# Altium PCB panel.PcbDoc (part 1 of 3)
Units mm, origin at the board's own origin, x right, y up, seen from the top; angles counter-clockwise.
Board outline 152.4 x 101.6 mm, 2 copper layers (Top Layer, Bottom Layer); 276 components, 0 nets, 996 pads, 236 vias.
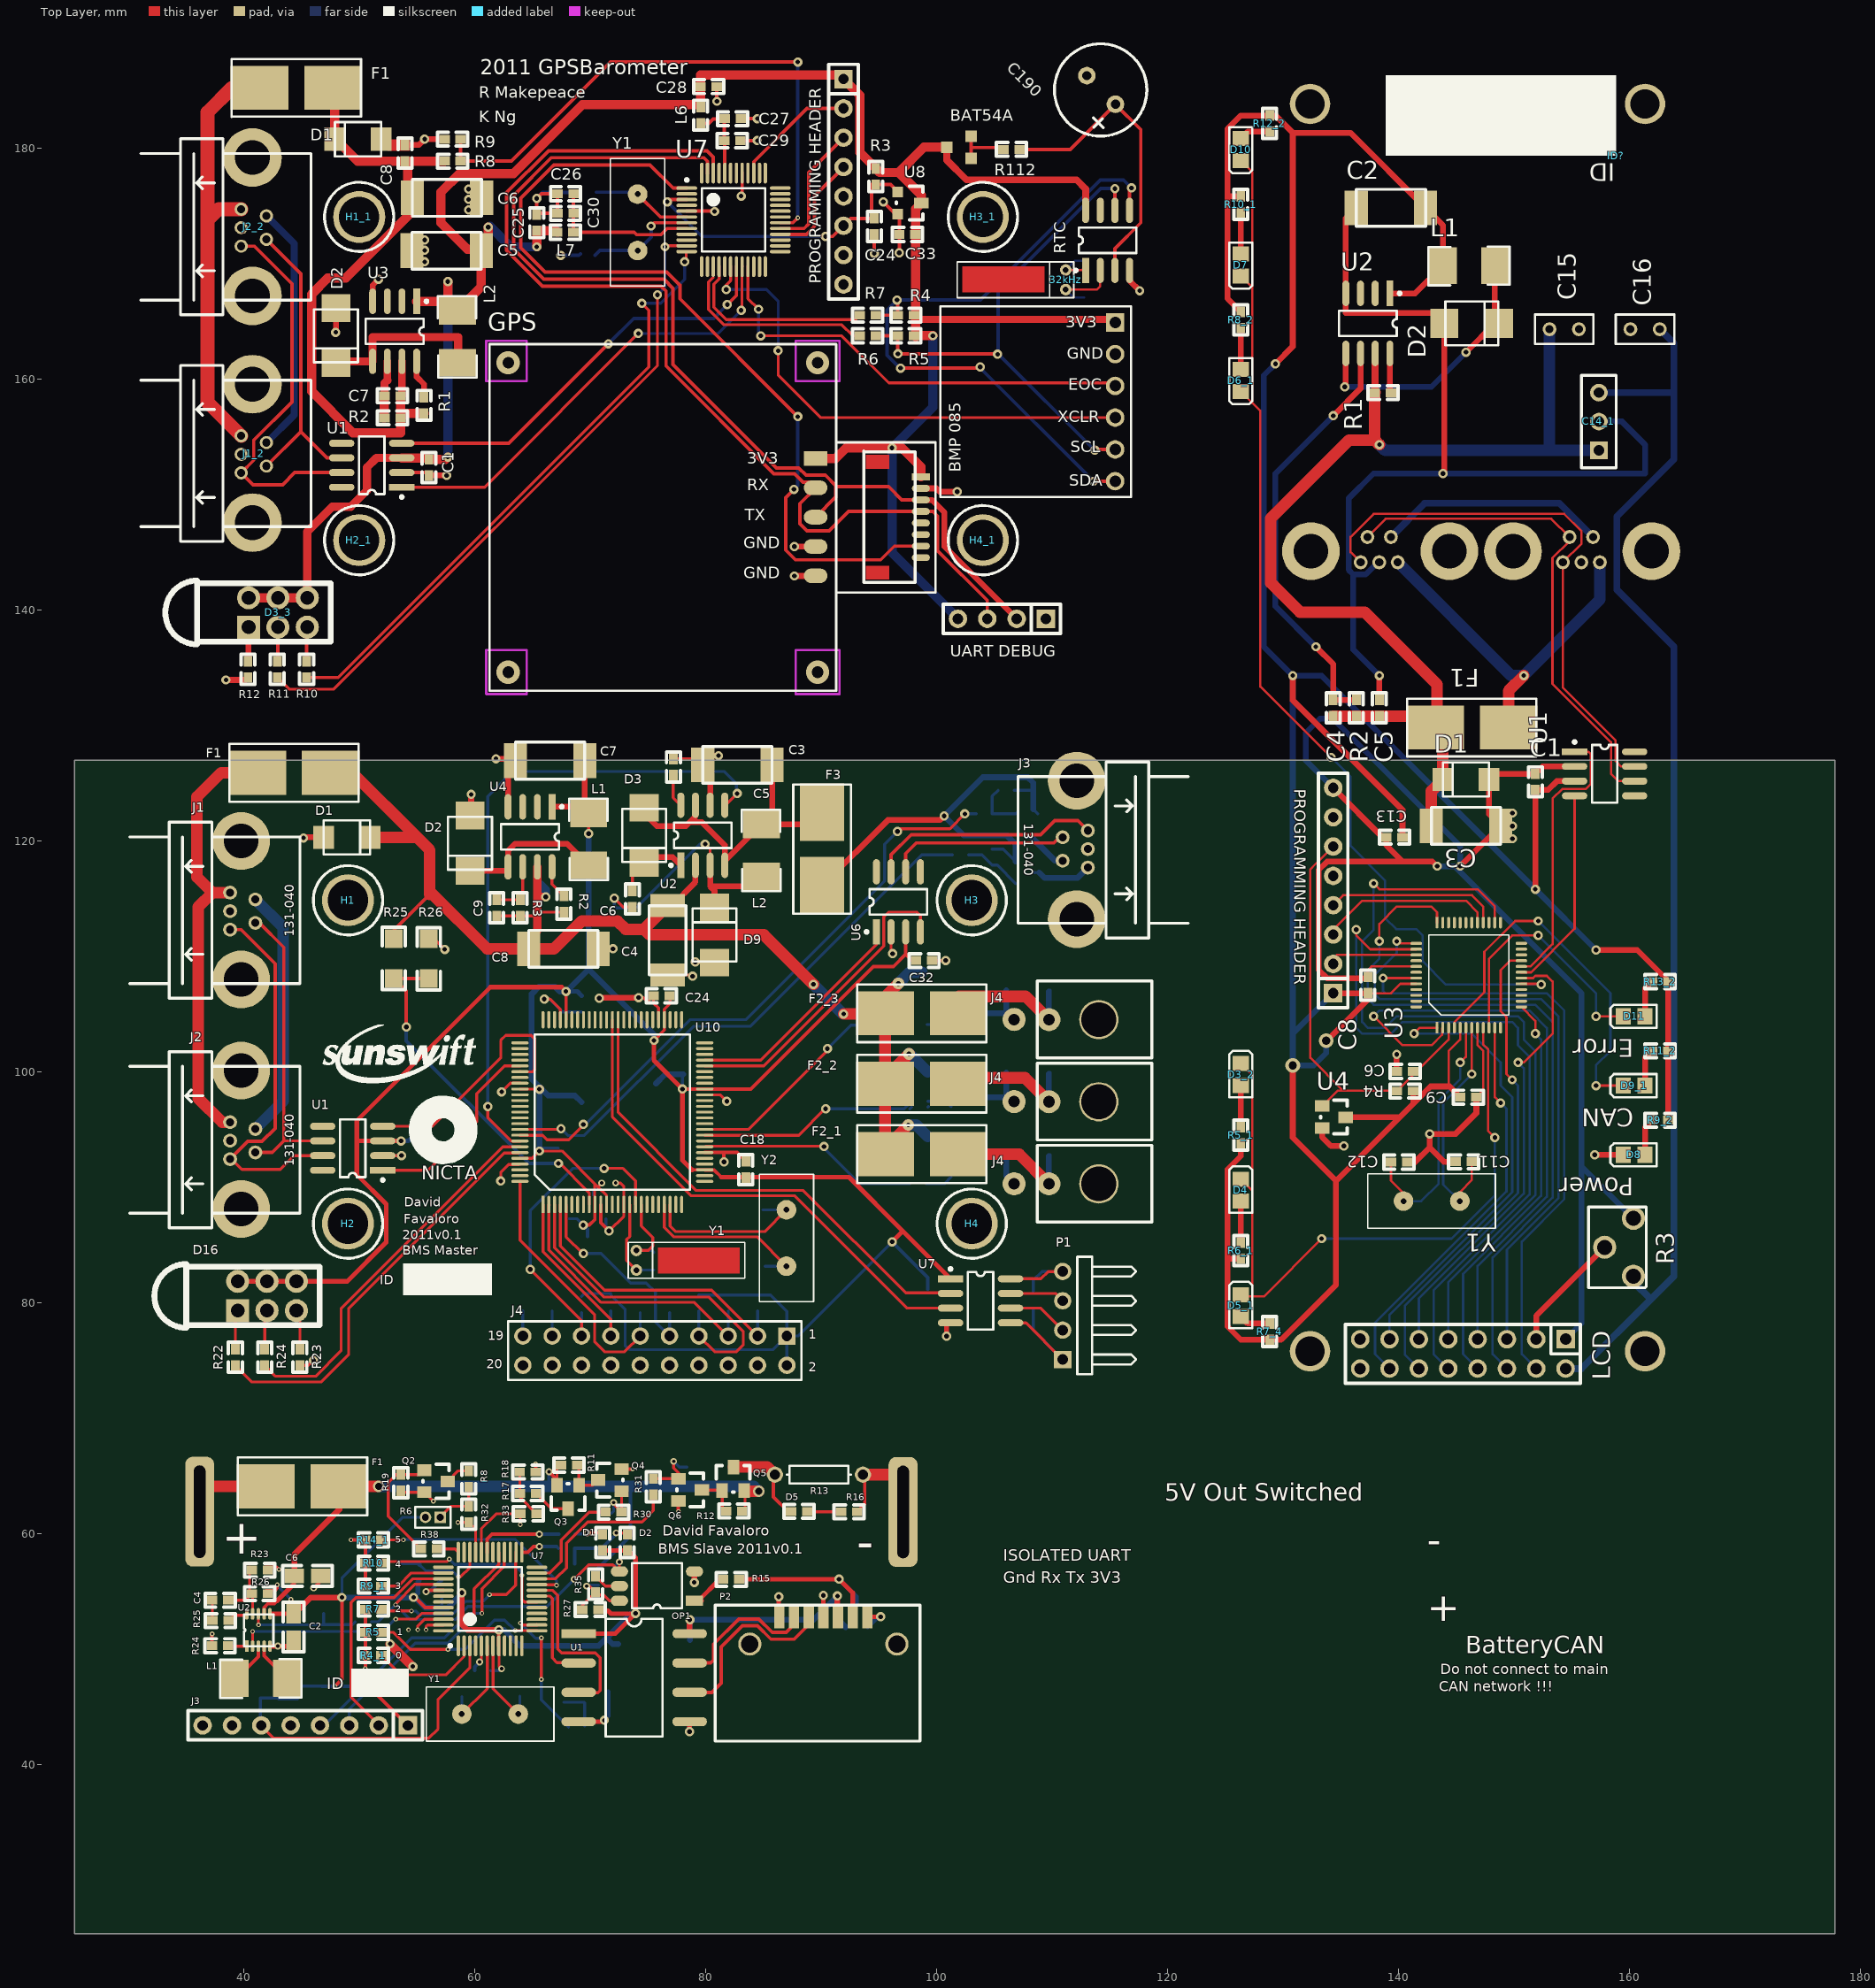
[diagram p0: Top Layer view]
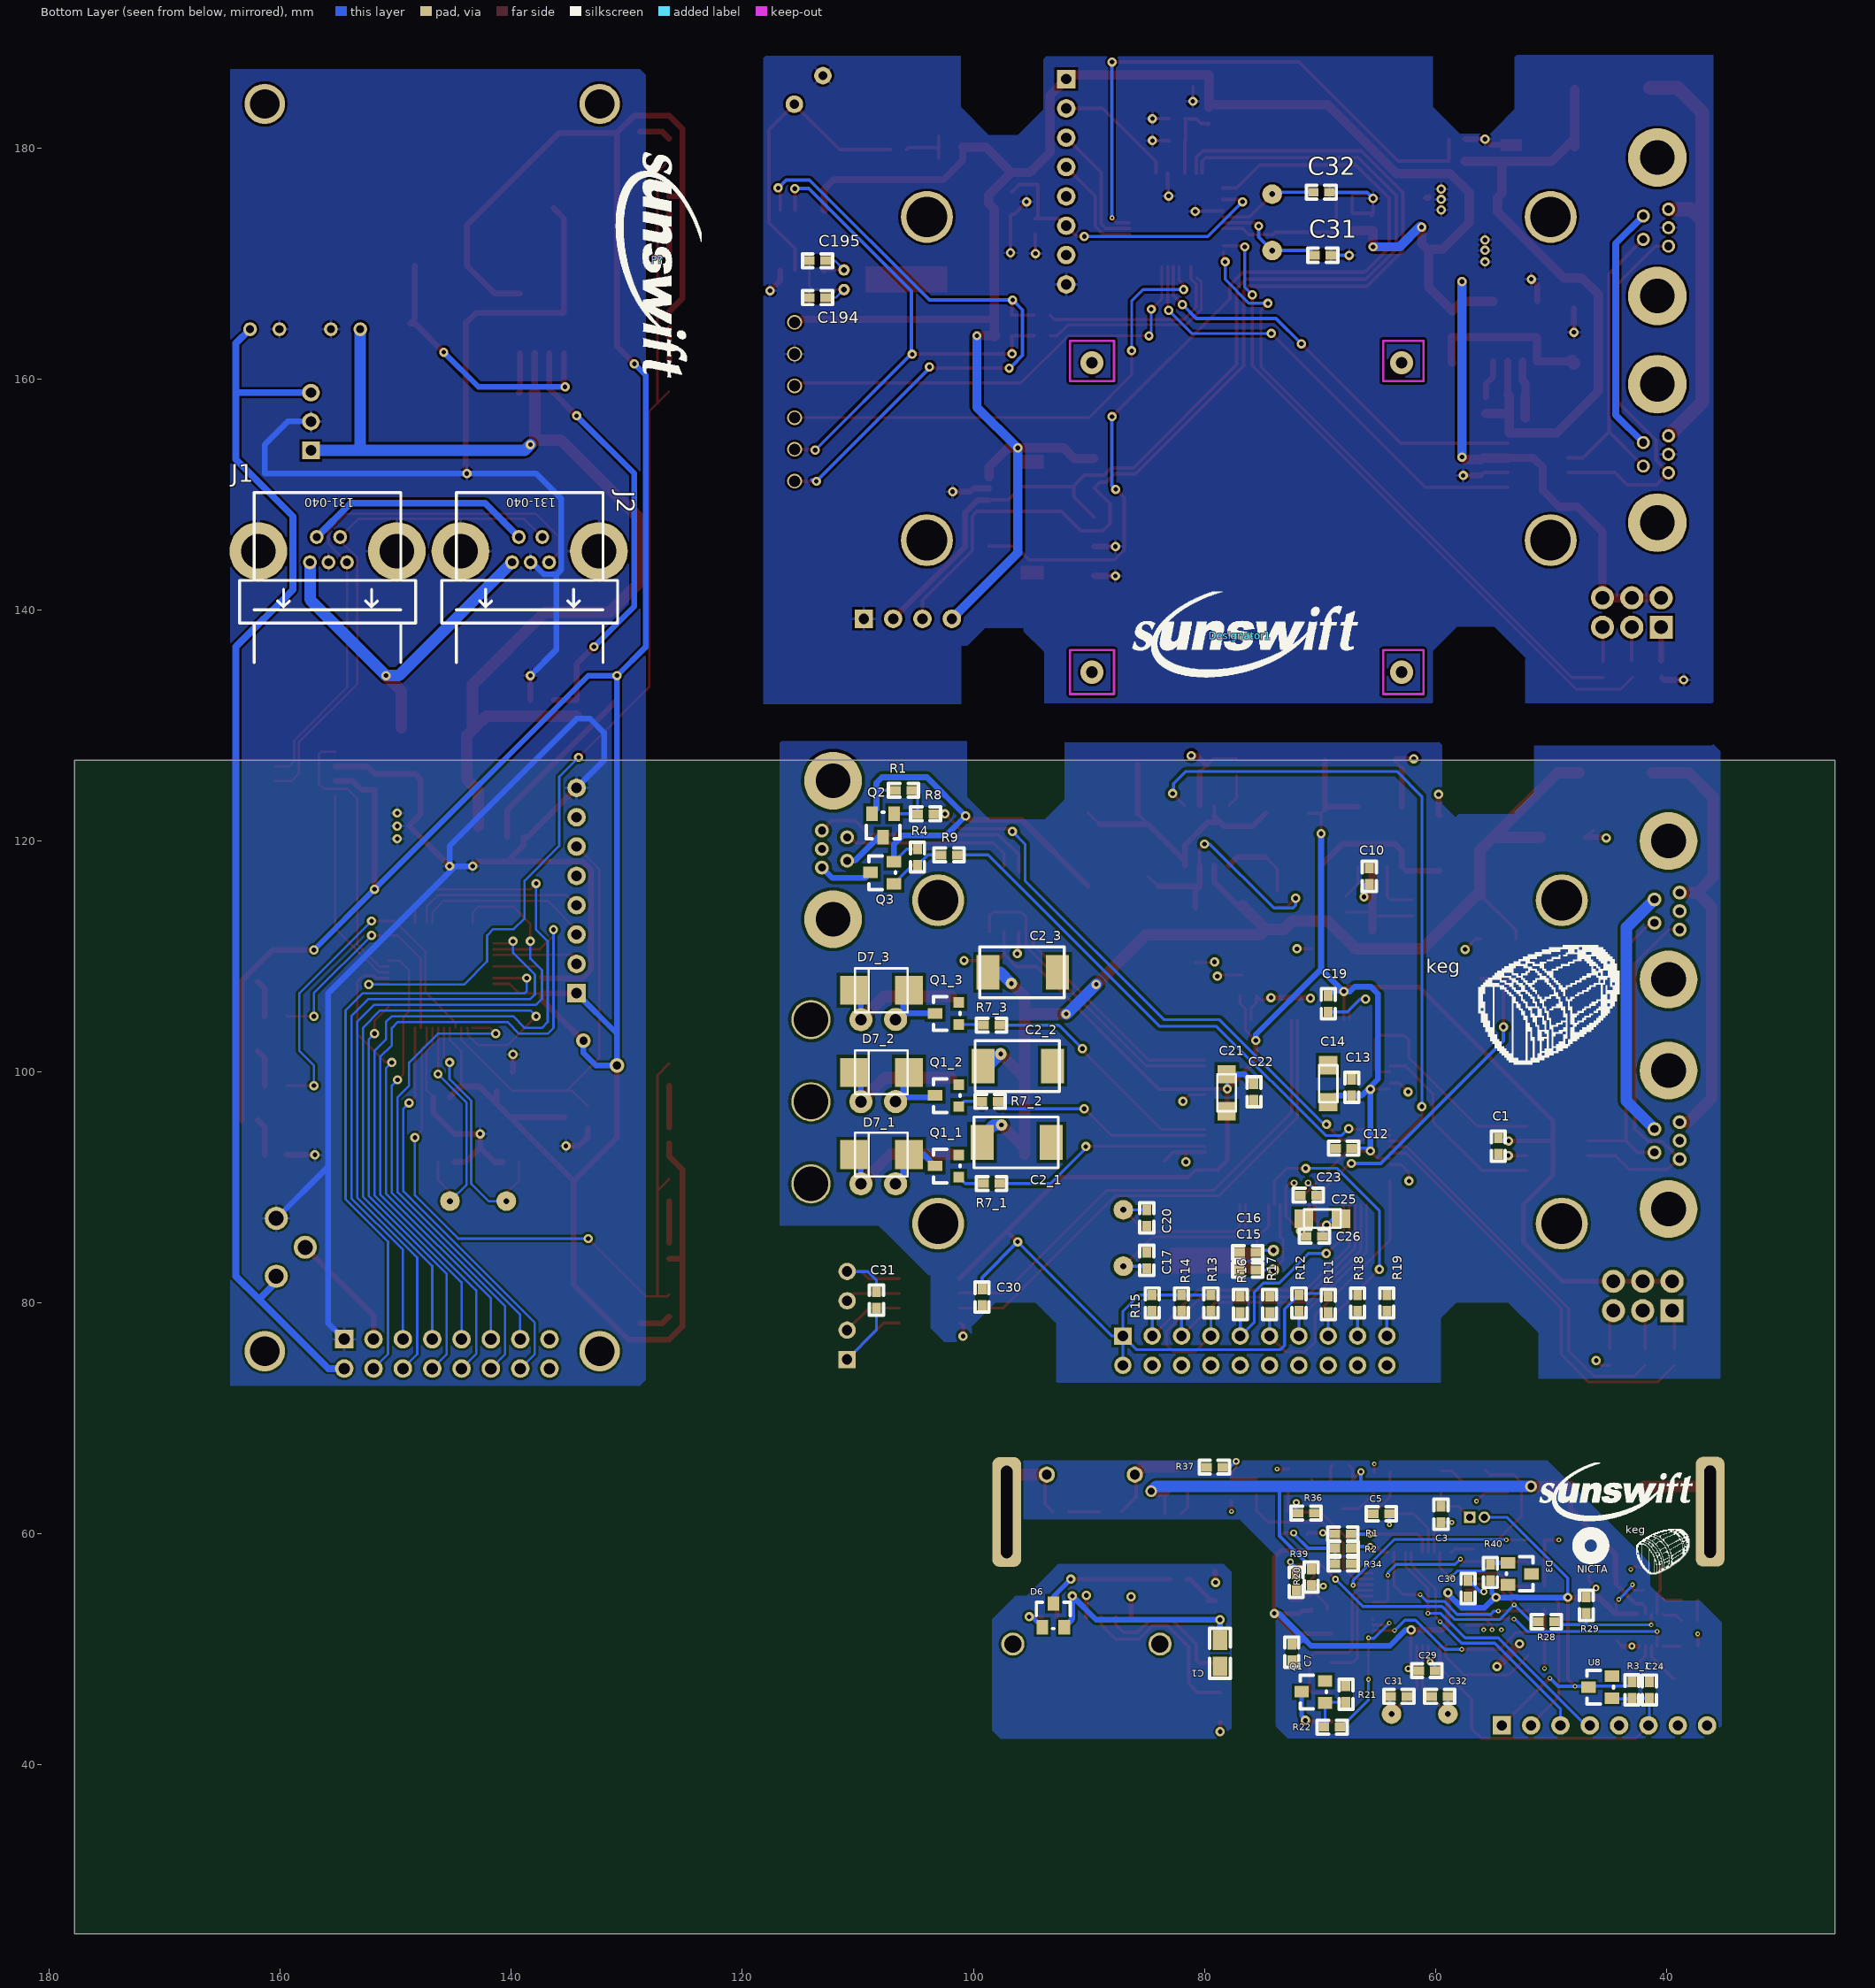
[diagram p1: Bottom Layer view, seen from below]

## Layer stack, top to bottom
Top Layer: signal copper 0.0356
Dielectric: dielectric 0.32, FR-4, Dk 4.8
Bottom Layer: signal copper 0.0356

## Board outline
25.4,25.4 177.8,25.4 177.8,127 25.4,127

## Design rules (kind name [scope] priority, off if disabled: settings)
Clearance [All] p1 off: gap=0.2
ComponentClearance [All] p1 off: gap=0.254 collisioncheckmode=3 verticalgap=0.254 showdistances=FALSE
DiffPairsRouting [All] p1 off: maxlimit=0.254 minlimit=0.254 mostfreqgap=0.254 maxuncoupledlength=12.7
FanoutControl Fanout_BGA [IsBGA] p1 off: bgadir=Out bgaviamode=Centered fanoutstyle=Auto fanoutdirection=Alternating viagrid=0.025 // Fanout_BGA (Default Rule)
FanoutControl Fanout_LCC [IsLCC] p2 off: bgadir=Out bgaviamode=Centered fanoutstyle=Auto fanoutdirection=Alternating viagrid=0.025 // Fanout_LCC (Default Rule)
FanoutControl Fanout_SOIC [IsSOIC] p3 off: bgadir=Out bgaviamode=Centered fanoutstyle=Auto fanoutdirection=Alternating viagrid=0.025 // Fanout_SOIC (Default Rule)
FanoutControl Fanout_Small [(CompPinCount < 5)] p4 off: bgadir=Out bgaviamode=Centered fanoutstyle=Auto fanoutdirection=OutThenIn viagrid=0.025 // Fanout_Small (Default Rule)
FanoutControl Fanout_Default [All] p5 off: bgadir=Out bgaviamode=Centered fanoutstyle=Auto fanoutdirection=Alternating viagrid=0.025 // Fanout_Default (Default Rule)
Height [All] p1 off: minheight=0 maxheight=25.4 prefheight=12.7
HoleSize [All] p1 off: absolutevalues=TRUE maxlimit=2.54 minlimit=0.025 maxpercent=80.000 minpercent=20.000
HoleToHoleClearance [All] p1 off: gap=0.254 allowstackedmicrovias=TRUE
LayerPairs [All] p1 off: enforce=TRUE
MinimumSolderMaskSliver [All] p1 off: minsoldermaskwidth=0.254
NetAntennae [All] p1 off: netantennaetolerance=0
PasteMaskExpansion [All] p1 off: expansion=0
PlaneClearance [All] p1 off: clearance=0.508
PlaneConnect [All] p1 off: planeconnectstyle=Relief reliefexpansion=0.508 reliefentries=4 reliefconductorwidth=0.254 reliefairgap=0.254
PolygonConnect [All] p1 off: connectstyle=Relief reliefconductorwidth=0.254 reliefentries=4 polygonreliefangle="90 Angle"
RoutingCorners [All] p1 off: cornerstyle=45-Degree minsetback=2.54 maxsetback=2.54
RoutingLayers [All] p1 off: top layer_v5=TRUE bottom layer_v5=TRUE
RoutingPriority [All] p1 off: routingpriority=0
RoutingTopology [All] p1 off: topology=Shortest
RoutingVias [All] p1 off: holewidth=0.711 width=1.27 viastyle="Through Hole" minholewidth=0.711 minwidth=1.27 maxholewidth=0.711 maxwidth=1.27
ShortCircuit [All] p1 off: allowed=FALSE
SilkToSilkClearance [All] p1 off: silktosilkclearance=0.254
SilkscreenOverComponentPads [All] p1 off: minsilkscreentomaskgap=0.254
SolderMaskExpansion [All] p1 off: expansion=0.102
TestPointUsage [All] p1 off: valid=0 allowmultiple=FALSE
Testpoint [All] p1 off: side=15 testpointundercomponent=TRUE minsize=1.016 maxsize=2.54 preferedsize=1.524 minholesize=0 maxholesize=1.016 preferedholesize=0.813 testpointgrid=0.025 style=1023 order=0123456789
UnRoutedNet [All] p1 off:
Width [All] p1 off: maxlimit=0.254 minlimit=0.254 preferedwidth=0.254

## Components (designator, comment, footprint, x,y, rotation, side; value= is the part's Value field where it differs from the comment)
32kHz "XTAL2" WATCHA 111.198,167.756 r90 top
+ "tab_connection" tab_connect 40.612,64.531 r90 top
- "tab_connection" tab_connect 101.512,64.511 r90 top
BAT54A "BAT54A" SOT23_2 103.008,181.032 r270 top
"BMP 085" "Component_1" PCBComponent_1 116.851,149.79 r90 top (schematic designator "Barometer BMP 085")
C1 "100nF" 0603 56.064,151.657 r90 top
C1 "100nF" 0603 151.852,125.828 r270 top
C1 "4.7uF" 0805 78.652,50.817 r270 bottom
C1 "100nF" 0603 54.544,92.895 r90 bottom
C2 "4u7 35V" MCCT-CASEC 142.352,174.828 r180 top
C2 "4.7uF" 0805 44.346,53.087 r270 top
C2_1 "100uF 35V" MCCT-CASED 99.248,93.911 r180 bottom (schematic designator C2)
C2_2 "100uF 35V" MCCT-CASED 99.152,100.515 r180 bottom (schematic designator C2)
C2_3 "100uF 35V" MCCT-CASED 98.74,108.643 r180 bottom (schematic designator C2)
C3 "4u7 35V" MCCT-CASEC 142.852,121.328 r0 top
C3 "100uF 35V" MCCT-CASEC 85.774,126.6 r180 top
C3 "100nF" 0603 59.512,61.011 r90 bottom
C4 "1n" 0603 134.352,130.828 r90 top
C4 "1.5nF" 0603 37.292,54.271 r0 top
C4 "10uF 35V" MCCT-CASEC 76.726,114.408 r270 top
C5 "4u7 35V" MCCT-CASEC 60.59,171.126 r180 top
C5 "100nF" 0603 138.352,130.828 r90 top
C5 "3.3nF" 0603 77.234,127.108 r270 top
C5 "100nF" 0603 63.972,61.751 r0 bottom
C6 "4u7 35V" MCCT-CASEC 54.621,175.698 r0 top
C6 "10nF" 0603 141.277,100.053 r180 top
C6 "4.7uF" 0805 44.402,56.363 r0 top
C6 "100nF" 0603 73.678,114.281 r90 top
C7 "1n" 0603 53.605,158.553 r180 top
C7 "4u7 35V" MCCT-CASEC 69.556,126.963 r180 top
C7 "100nF" 0603 72.432,50.448 r270 bottom
C8 "100nF" 0603 53.986,178.873 r90 top
C8 "100nF" 0603 137.352,106.828 r90 top
C8 "4u7 35V" MCCT-CASEC 64.704,110.675 r0 top
C9 "100nF" 0603 145.352,97.828 r0 top
C9 "1n" 0603 61.929,113.527 r90 top
C10 "100nF" 0603 65.72,116.263 r90 bottom
C11 "18pF" 0603 146.352,92.228 r180 top
C12 "18pF" 0603 139.352,92.203 r0 top
C12 "100nF" 0603 68.641,93.403 r180 bottom
C13 "100nF" 0603 140.352,120.328 r180 top
C13 "100nF" 0603 67.244,97.975 r90 bottom
C14 "10uF" MCCT-CASEA 69.276,98.991 r90 bottom
C14_1 "MC78M05CT" 7805 157.352,153.828 r90 top (schematic designator C14)
C15 "100u" RAD-0.1 154.352,164.328 r0 top
C15 "18pF" 0603 75.545,82.853 r0 bottom
C16 "100u" RAD-0.1 161.352,164.328 r180 top
C16 "18pF" 0603 75.545,84.377 r0 bottom
C17 "18pF" 0603 84.985,82.994 r90 bottom
C18 "100nF" 0603 83.5,90.863 r90 top
C19 "100nF" 0603 69.276,105.214 r90 bottom
C20 "18pF" 0603 84.985,88.074 r270 bottom
C21 "10uF" MCCT-CASEA 78.073,98.206 r270 bottom
C22 "100nF" 0603 75.704,97.591 r90 bottom
C23 "100nF" 0603 70.292,89.339 r0 bottom
C24 "10nF" 0603 94.626,173.92 r270 top
C24 "100nF" 0603 75.499,106.611 r0 top
C24 "10nF" 0603 41.472,45.791 r90 bottom
C25 "1u" 0603 65.398,174.241 r270 top
C25 "10uF" MCCT-CASEA 69.784,87.307 r0 bottom
C26 "10n" 0603 67.198,176.056 r0 top
C26 "100nF" 0603 69.784,85.783 r0 bottom
C27 "10n" 0603 81.672,182.556 r0 top
C28 "1u" 0603 79.591,185.328 r0 top
C29 "100nF" 0603 81.635,180.651 r0 top
C29 "100nF" 0603 61.432,48.171 r180 bottom
C30 "100nF" 0603 67.198,174.356 r0 top
C30 "100nF" 0603 57.172,55.968 r270 bottom
C30 "100nF" 0603 99.248,79.814 r90 bottom
C31 "18pF" 0603 70.447,170.723 r180 bottom
C31 "18pF" 0603 63.869,45.939 r180 bottom
C31 "100nF" 0603 108.392,80.957 r270 bottom
C32 "100nF" 0603 99.629,109.659 r180 top
C32 "18pF" 0603 70.574,176.184 r180 bottom
C32 "18pF" 0603 58.916,45.939 r0 bottom
C33 "100nF" 0603 98.182,172.523 r180 top
C190 "Cap Pol2" SUPERCAP 115.5,183.802 r135 top
C194 "Cap" 0603 114.198,167.056 r180 bottom
C195 "Cap" 0603 114.198,170.256 r180 bottom
D1 "12V Transient Suppressor" SMA#1 49.922,180.778 r180 top
D1 "12V Transient Suppressor" SMA#2 145.852,125.328 r180 top
D1 "LED Orange" 0603_LED 71.762,58.021 r90 top
D1 "12V Transient Suppressor" SMA#2 48.956,120.327 r0 top
D2 "MBRS130" SMB 48.017,163.76 r270 top
D2 "MBRS130" SMB 146.352,164.828 r0 top
D2 "LED Red" 0603_LED 73.882,58.021 r90 top
D2 "MBRS130" SMB 59.624,119.819 r270 top
D3 "1N914" SMB 74.694,120.504 r270 top
D3 "LM4040" SOT23-3 53.712,57.511 r270 bottom
D3_2 "Left Turn LED1" 0805LED12 126.352,98.828 r90 top (schematic designator D3)
D3_3 "1882-2781" LED_TRILEVEL 40.453,138.526 r90 top (schematic designator D3)
D4 "Left Turn LED2" 0805LED12 126.352,88.828 r90 top
D5 "LED Green" 0603_LED 86.862,61.301 r0 top
D5_1 "Left Turn LED3" 0805LED12 126.352,78.828 r90 top (schematic designator D5)
D6 "BAV99" BAV99 94.687,51.239 r180 bottom
D6_1 "Right Turn LED1" 0805LED12 126.352,160.828 r270 top (schematic designator D6)
D7 "Right Turn LED2" 0805LED12 126.352,170.828 r270 top
D7_1 "15V" SMB 107.964,92.859 r0 bottom (schematic designator D7)
D7_2 "15V" SMB 107.964,99.971 r0 bottom (schematic designator D7)
D7_3 "15V" SMB 107.964,107.083 r0 bottom (schematic designator D7)
D8 "Power" 0805LED12 161.352,92.828 r180 top
D9 "MBRS130" SMB 80.79,111.868 r90 top
D9_1 "CAN" 0805LED12 161.352,98.828 r180 top (schematic designator D9)
D10 "Right Turn LED3" 0805LED12 126.352,180.828 r270 top
D11 "Error" 0805LED12 161.352,104.828 r180 top
D16 "1882-2781" LED_TRILEVEL 39.507,79.345 r90 top
Designator1 "Comment" SUNSWIFTLOGO 76.898,137.756 r180 bottom
F1 "125mA/3A" LITTELFUSE-154 44.588,185.223 r0 top
F1 "125mA/3A" LITTELFUSE-154 146.352,129.828 r180 top
F1 "FUSE" LITTELFUSE-154 45.124,64.127 r180 top
F1 "125mA/3A" LITTELFUSE-154 44.384,125.915 r0 top
F2_1 "Fuse" LITTELFUSE-154 98.74,92.895 r0 top (schematic designator F2)
F2_2 "Fuse" LITTELFUSE-154 98.74,98.991 r0 top (schematic designator F2)
F2_3 "Fuse" LITTELFUSE-154 98.74,105.087 r0 top (schematic designator F2)
F3 "125mA/3A" LITTELFUSE-154 90.104,119.311 r90 top
GPS "GPS" GPS 91.324,133.026 r90 top
H1 "HOLE" M2.5 49.057,114.875 r0 top
H1_1 "HOLE" M2.5 50.024,174.047 r0 top (schematic designator H1)
H2 "HOLE" M2.5 49.057,86.875 r0 top
H2_1 "HOLE" M2.5 50.024,146.056 r0 top (schematic designator H2)
H3 "HOLE" M2.5 103.057,114.875 r0 top
H3_1 "HOLE" M2.5 104.024,174.047 r0 top (schematic designator H3)
H4 "HOLE" M2.5 103.057,86.875 r0 top
H4_1 "HOLE" M2.5 104.024,146.056 r0 top (schematic designator H4)
ID? "IDBOX" IDBOX 158.852,179.328 r180 top
J1 "CON5-S" TRIAD5F#1 41.032,114.95 r90 top
J1 "CON5-S" TRIAD5F#1 156.852,146.328 r0 bottom
J1_2 "CON5-S" TRIAD5F#2 41.998,154.506 r90 top (schematic designator J1)
J2 "CON5-S" TRIAD5F#1 41.032,95.075 r90 top
J2 "CON5-S" TRIAD5F#1 139.352,146.328 r0 bottom
J2_2 "CON5-S" TRIAD5F#2 41.998,174.131 r90 top (schematic designator J2)
J3 "LPC SWD Connector" IDC8 54.252,43.431 r180 top
J3 "CON5-S" TRIAD5F#1 110.932,118.295 r270 top
J4 "CON2" MICROFIT-2 109.74,104.543 r90 top
J4 "CON2" MICROFIT-2 109.74,97.431 r90 top
J4 "CON2" MICROFIT-2 109.74,90.319 r90 top
J4 "ARM JTAG" HDR2X10 87.056,77.147 r180 top
L1 "330uH" 1812 148.352,169.828 r180 top
L1 "4.7uH" 1812 43.766,47.499 r180 top
L1 "330uH" 1812 69.896,117.9 r90 top
L2 "330uH" 1812 58.531,161.414 r90 top
L2 "10uH" 1812 84.854,116.948 r90 top
L6 "Ferrite" 0603 79.591,182.153 r90 top
L7 "Ferrite" 0603 67.176,172.717 r0 top
LCD "LCD" IDC16 154.472,76.868 r180 top
OP1 "VOM452T" VOM452T 79.806,54.171 r180 top
P1 "Header 4H" HDR1X4H 110.932,75.115 r90 top
P2 "SATA" 47080-4005-SATA 83.842,50.471 r0 top
P? "SUN_LOGO" SUNSWIFTLOGO 127.352,170.328 r270 bottom
"PROGRAMMING HEADER" "LPC SWD Connector" IDC8 91.959,185.985 r270 top (schematic designator J3)
"PROGRAMMING HEADER" "LPC SWD Connector" IDC8 134.352,106.828 r90 top (schematic designator J3)
Q1 "ZXM61N02F" SOT23-3 69.554,45.376 r90 bottom
Q1_1 "ZXM61N02F" SOT23(3) 101.28,90.914 r90 bottom (schematic designator Q1)
Q1_2 "ZXM61N02F" SOT23(3) 101.28,97.01 r90 bottom (schematic designator Q1)
Q1_3 "ZXM61N02F" SOT23(3) 101.28,104.122 r90 bottom (schematic designator Q1)
Q2 "ZXM61N02F" SOT23-3 55.665,65.524 r270 top
Q2 "ZXM61P03F" SOT23-3 106.868,122.359 r0 bottom
Q3 "ZXM61P03F" SOT23-3 69.061,64.227 r180 top
Q3 "ZXM61P03F" SOT23-3 106.868,116.314 r90 bottom
Q4 "ZXM61N02F" SOT23-3 72.744,63.719 r90 top
Q5 "ZXM61P03F" SOT23-3 81.455,63.771 r0 top
Q6 "ZXM61N02F" SOT23-3 77.66,64.776 r270 top
R1 "100k" 0603 55.637,158.426 r270 top
R1 "100k" 0603 139.352,158.828 r180 top
R1 "100R" 0603 67.312,60.011 r0 bottom
R1 "10K" 0603 105.344,124.391 r0 bottom
R2 "1R2" 0603 53.605,156.648 r180 top
R2 "1R2" 0603 136.352,130.828 r90 top
R2 "100k" 0603 67.752,115.247 r270 top
R2 "100R" 0603 67.295,58.751 r0 bottom
R3 "10k" 0603 94.753,176.841 r90 top
R3 "RPot" trimpot 160.352,82.328 r90 top
R3 "1R2" 0603 63.961,113.527 r90 top
R3_1 "10k" 0603 42.979,45.794 r90 bottom (schematic designator R3)
R4 "4K7" 0603 96.658,165.538 r0 top
R4 "10k" 0603 139.877,98.353 r0 top
R4 "10K" 0603 104.836,117.914 r90 bottom
R4_1 "0R" 0603 51.952,49.491 r180 top (schematic designator R4)
R5 "4K7" 0603 96.658,163.76 r0 top
R5 "0R" 0603 51.952,51.491 r180 top
R5_1 "Left Turn 1" 0603 126.352,93.828 r90 top (schematic designator R5)
R6 "0R" 0603 93.356,163.76 r0 top
R6 "NTC" MHDR1X2 57.032,61.451 r180 top
R6_1 "Left Turn 2" 0603 126.352,83.828 r90 top (schematic designator R6)
R7 "0R" 0603 93.356,165.538 r0 top
R7 "0R" 0603 51.952,53.491 r180 top
R7_1 "100R" 0603 97.724,90.355 r0 bottom (schematic designator R7)
R7_2 "100R" 0603 97.851,97.467 r0 bottom (schematic designator R7)
R7_3 "100R" 0603 97.724,104.071 r0 bottom (schematic designator R7)
R7_4 "Left Turn 3" 0603 128.852,76.828 r90 top (schematic designator R7)
R8 "100K" 0603 58.812,178.873 r180 top
R8 "1K" 0603 59.512,64.074 r90 top
R8 "100" 0603 103.439,122.359 r0 bottom
R8_2 "Res3" 0603 126.352,165.828 r270 top (schematic designator R8)
R9 "20K" 0603 57.415,180.778 r0 top
R9 "100" 0603 101.407,118.803 r0 bottom
R9_1 "0R" 0603 51.952,55.491 r180 top (schematic designator R9)
R9_2 "Res3" 0603 163.352,95.828 r180 top (schematic designator R9)
R10 "1K" 0603 45.477,135.566 r270 top
R10 "0R" 0603 51.952,57.491 r180 top
R10_1 "Res3" 0603 126.352,175.828 r270 top (schematic designator R10)
R11 "1K" 0603 42.937,135.566 r270 top
R11 "10k" 0603 67.492,65.971 r0 top
R11 "10k" 0603 69.276,79.179 r90 bottom
R11_2 "Res3" 0603 163.352,101.828 r180 top (schematic designator R11)
R12 "1K" 0603 40.397,135.566 r270 top
R12 "10k" 0603 81.784,61.994 r0 top
R12 "10k" 0603 71.816,79.306 r90 bottom
R12_2 "Res3" 0603 128.852,182.828 r270 top (schematic designator R12)
R13 "100R" AXIAL-0.3 89.828,65.143 r180 top
R13 "10k" 0603 79.436,79.306 r90 bottom
R13_2 "Res3" 0603 163.352,107.828 r180 top (schematic designator R13)
R14 "10k" 0603 81.976,79.306 r90 bottom
R14_1 "0R" 0603 51.952,59.491 r180 top (schematic designator R14)
R15 "2k" 0603 81.533,56.074 r0 top
R15 "10k" 0603 84.516,79.306 r90 bottom
R16 "1k0" 0603 93.136,61.925 r180 top
R16 "10k" 0603 76.896,80.576 r270 bottom
R17 "20k0 1%" 0603 63.94,63.515 r0 top
R17 "10k" 0603 74.356,80.576 r270 bottom
R18 "10k, 1%" 0603 65.312,65.371 r180 top
R18 "10k" 0603 66.736,80.703 r270 bottom
R19 "10K" 0603 53.633,65.143 r270 top
R19 "10k" 0603 64.196,80.703 r270 bottom
R20 "0R" 0603 70.752,56.971 r270 bottom
R21 "10K" 0603 67.738,45.432 r90 bottom
R22 "1K" 0603 39.304,74.607 r90 top
R22 "100R" 0603 68.246,43.273 r0 bottom
R23 "200k" 0603 42.116,56.871 r180 top
R23 "1K" 0603 41.844,74.607 r90 top
R24 "20k" 0603 38.669,50.331 r180 top
R24 "1K" 0603 44.892,74.607 r90 top
R25 "15k" 0603 38.709,52.511 r180 top
R25 "100k" 1206 53.012,111.533 r270 top
R26 "340k" 0603 40.719,54.839 r0 top
R26 "20K" 1206 56.06,108.104 r90 top
R27 "0R" 0603 70.732,53.451 r180 top
R28 "0R" 0603 49.692,52.411 r0 bottom
R29 "10k" 0603 46.94,54.531 r270 bottom
R30 "100R" 0603 71.352,61.891 r0 top
R31 "100R" 0603 75.492,63.391 r90 top
R32 "1K" 0603 59.512,62.408 r270 top
R33 "1K" 0603 65.369,61.751 r180 top
R34 "100R" 0603 67.295,57.411 r0 bottom
R35 "0R" 0603 70.492,54.954 r90 top
R36 "10k" 0603 70.495,61.811 r0 bottom
R37 "10k" 0603 79.812,65.791 r180 bottom
R38 "100R" 0603 56.749,58.711 r180 top
R39 "1K" 0603 72.052,56.531 r270 bottom
R40 "1k" 0603 55.232,55.974 r90 bottom
R112 "2k" 0603 107.199,179.889 r180 top
RTC "Component_1" SO8 114.819,172.015 r0 top (schematic designator MCP79410-I/SN-ND)
U1 "SN65HVD232" SO8 51.111,152.546 r90 top
U1 "SN65HVD232" SO8 157.852,125.828 r270 top
U1 "ISO1050" SOP8 69.032,51.371 r0 top
U1 "SN65HVD232" SO8 49.464,93.403 r90 top
U2 "LTC1474" SO8 137.352,164.828 r180 top
U2 "LTC3440" MSOP10 41.998,48.022 r90 top
U2 "LT1376" SO8 79.774,120.504 r0 top
U3 "LTC1474" SO8 53.097,164.141 r180 top
U3 "LPC11C14" QFP48 143.352,103.828 r90 top
U4 "XC61CN2002MR" SOT23-3 133.402,97.053 r270 top
U4 "LTC1474" SO8 64.816,120.368 r180 top
U6 "SN65HVD232" SO8 96.708,114.739 r0 top
U7 "LPC11C14" TSQFP50P900X900-48N 82.434,173.793 r0 top
U7 "LPC11C14" QFP48-long 60.672,54.371 r90 top
U7 "IL712" SO8 103.82,80.195 r270 top
U8 "XC61CN2002MR" SOT23(3) 96.658,176.206 r270 top
U8 "XC61CN2002MR" SOT23-3 44.72,45.786 r90 bottom
U10 "LPC1768" QFP100 65.944,88.532 r90 top
"UART DEBUG" "UART_Header" IDC4 109.485,139.249 r180 top (schematic designator J6)
Y1 "12 MHz" HC49/4H 74.13,179.105 r270 top
Y1 "12 MHz" HC49/4H 137.352,88.828 r0 top
Y1 "12 MHz" HC49/4H 55.831,44.415 r0 top
Y1 "32.768 KHz" WATCHA 74.021,84.553 r270 top
Y2 "12 MHz" HC49/4H 87.017,80.109 r90 top

## Footprints (in the part's own frame and the unit in brackets; to place one, negate y for a bottom-side part, rotate by r counter-clockwise, add the part's x,y. Pads: shape width x height; smd on the part's side, far side on the other; paste and mask are expansions set on the pad)
0603 [mil]
  rect 35.43x30 smd: 1(0,0) 2(55,0)
  silkscreen extent -24,-24 79,24
0603_LED [mm]
  rect 0.9x0.762 smd: A(0.55,0.65) K(1.947,0.65)
  silkscreen extent -0.05,0.05 2.55,1.25
0805 [mm]
  rect 1.7x1.27 smd: 1(0,0) 2(2.286,0)
  silkscreen extent -1,-0.9 3.3,0.9
0805LED12 [mm]
  rect 1.3x1.4 smd: 1(0,0) 2(1.9,0)
  silkscreen extent -1,-1 3,1
1206 [mil]
  rect 62.99x60 smd: 1(0,0) 2(135,0)
  silkscreen extent -39,-39 173,39
1812 [mm]
  rect 2.4x3.2 smd: 1(0,0) 2(4.5,0)
  silkscreen extent -1.27,-1.66 5.77,1.7
7805 [mil]
  rect 60x60 hole 35.43: 1(0,0)
  round 60 hole 35.43: 2(98.43,0) 3(196.85,0)
  silkscreen extent -59,-59 256,59
47080-4005-SATA [mm]
  round 2 hole 1.5: 0(0,0) 0(12.74,0)
  rect 0.9x2 smd: 1(2.56,2.36) 2(3.83,2.36) 3(5.1,2.36) 4(6.37,2.36) 5(7.64,2.36) 6(8.91,2.36) 7(10.18,2.36)
  silkscreen extent -3,-8.4 14.74,3.36
AXIAL-0.3 [mm] "Resistor; 2 Leads"
  round 1.4 hole 0.85: 1(-3.81,0) 2(3.81,0)
  silkscreen extent -2.77,-0.76 2.77,0.76
BAV99 [mm]
  rect 1x1.25 smd: A(0.65,0.7) C(1.615,2.732) K(2.555,0.7)
  silkscreen extent 0.14,0.57 3.06,2.86
GPS [mm]
  rect 0.6x1.55 smd: 3V3(18.515,-7.333)
  rect 1.27x2.05 smd: 3V3(20.105,1.777)
  oval 0.6x1.55 smd: BAT(11.515,-7.333) GND(17.515,-7.333) PPS(12.515,-7.333) RX(15.515,-7.333) RX2(13.515,-7.333) TX(16.515,-7.333) TX2(14.515,-7.333)
  oval 1.27x2.05 smd: GND(9.945,1.777) GND(12.485,1.777) RX(17.565,1.777) TX(15.025,1.777)
  Top Layer region: 20.415,-2.583 19.215,-2.583 19.215,-4.583 20.415,-4.583
  Top Layer region: 10.815,-2.583 9.615,-2.583 9.615,-4.583 10.815,-4.583
  Keep-Out Layer lines w0.2: -0.3,30.3 -0.3,26.8 3.5,26.8 3.5,30.3 -0.3,30.3 ; 26.8,30.3 26.8,26.8 30.3,26.8 30.3,30.3 26.8,30.3 ; -0.3,3.5 3.5,3.5 3.5,-0.3 -0.3,-0.3 -0.3,3.5 ; 26.8,3.5 26.8,-0.3 30.3,-0.3 30.3,3.5 26.8,3.5
  silkscreen extent 0,-8.6 30,30
HC49/4H [mm]
  round 1.7 hole 0.5: 1(3.085,0) 2(7.965,0)
  silkscreen extent 0,-2.35 11.05,2.35
HDR1X4H [mm] "Connector; Header; 4 Position; Right Angle"
  rect 1.5x1.5 hole 0.9: 1(0,0)
  round 1.5 hole 0.9: 2(2.54,0) 3(5.08,0) 4(7.62,0)
  silkscreen extent -1.27,-6.35 8.89,-1.27
HDR2X10 [mm] "Connector; Header; 10x2 Position"
  rect 1.5x1.5 hole 0.9: 1(0,0)
  round 1.5 hole 0.9: 2(0,2.54) 3(2.54,0) 4(2.54,2.54) 5(5.08,0) 6(5.08,2.54) 7(7.62,0) 8(7.62,2.54) 9(10.16,0) 10(10.16,2.54) 11(12.7,0) 12(12.7,2.54) 13(15.24,0) 14(15.24,2.54) 15(17.78,0) 16(17.78,2.54) 17(20.32,0) 18(20.32,2.54) 19(22.86,0) 20(22.86,2.54)
  silkscreen extent -1.27,-1.27 24.13,3.81
IDBOX [mm] "Infobox"
  silkscreen extent 0,-7 19.95,0
IDC4 [mm]
  rect 1.6x1.6 hole 0.9: 1(0,0)
  round 1.6 hole 0.9: 2(2.54,0) 3(5.08,0) 4(7.62,0)
  silkscreen extent -1.27,-1.27 8.89,1.27
IDC8 [mm]
  rect 1.6x1.6 hole 0.9: 1(0,0)
  round 1.6 hole 0.9: 2(2.54,0) 3(5.08,0) 4(7.62,0) 5(10.16,0) 6(12.7,0) 7(15.24,0) 8(17.78,0)
  silkscreen extent -1.27,-1.27 19.05,1.27
IDC16 [mm]
  rect 1.6x1.6 hole 1: 1(0,0)
  round 1.6 hole 1: 2(0,2.54) 3(2.54,0) 4(2.54,2.54) 5(5.08,0) 6(5.08,2.54) 7(7.62,0) 8(7.62,2.54) 9(10.16,0) 10(10.16,2.54) 11(12.7,0) 12(12.7,2.54) 13(15.24,0) 14(15.24,2.54) 15(17.78,0) 16(17.78,2.54)
  silkscreen extent -1.27,-1.27 19.05,3.81
LED_TRILEVEL [mm]
  rect 2x2 hole 1.2: 1(0,0)
  round 2 hole 1.2: 2(0,-2.54) 3(0,-5.08) 4(2.54,-5.08) 5(2.54,-2.54) 6(2.54,0)
  silkscreen extent -1.49,-7.11 4.03,7.21
LITTELFUSE-154 [mm]
  rect 5x3.81 smd: 1(-3.185,0) 2(3.185,0)
  silkscreen extent -5.6,-2.51 5.6,2.5
M2.5 [mm]
  round 4.5 hole 3.5: 1(0,0)
  silkscreen extent -3,-3 3,3
MCCT-CASEA [mm]
  rect 1.6x1.6 smd: 1(-1.6,0) 2(1.6,0)
  silkscreen extent -1.6,-0.8 1.6,0.8
MCCT-CASEC [mm]
  rect 2x3 smd: 1(0,0) 2(6,0)
  silkscreen extent 0,-1.6 6,1.6
MCCT-CASED [mm]
  rect 2x3 smd: 1(0,0) 2(6,0)
  silkscreen extent -0.7,-2.2 6.6,2.2
MHDR1X2 [mm] "Connector; Header; 2 Position"
  rect 1x1 hole 0.6: 1(0,0)
  round 1 hole 0.6: 2(1.27,0)
  silkscreen extent -0.9,-0.9 2.17,0.9
MICROFIT-2 [mm]
  round 3.4 hole 3: 0(0,-4.32)
  round 2 hole 1: 1(0,0) 2(0.01,3.01)
  silkscreen extent -3.31,-8.91 3.33,1.01
MSOP10 [mm]
  rect 1x0.3 smd: 1(2.265,1.7)
  oval 1x0.3 smd: 2(2.265,1.2) 3(2.265,0.7) 4(2.265,0.2) 5(2.265,-0.3) 6(5.065,-0.3) 7(5.065,0.2) 8(5.065,0.7) 9(5.065,1.2) 10(5.065,1.7)
  silkscreen extent 2.25,-0.6 5.03,1.95
PCBComponent_1 [mm]
  rect 1.6x1.6 smd: 3V3(15.125,1.375)
  round 1.6 smd: EOC(9.625,1.375) GND(12.375,1.375) SCL(4.125,1.375) SDA(1.375,1.375) XCLR(6.875,1.375)
  silkscreen extent 0,0 16.5,16.5
QFP48 [mm]
  rect 1x0.26 smd: 1(0.013,0.01)
  oval 1x0.26 smd: 2(0.013,-0.49) 3(0.013,-0.99) 4(0.013,-1.49) 5(0.013,-1.99) 6(0.013,-2.49) 7(0.013,-2.99) 8(0.013,-3.49) 9(0.013,-3.99) 10(0.013,-4.49) 11(0.013,-4.99) 12(0.013,-5.49) 25(9.113,-5.49) 26(9.113,-4.99) 27(9.113,-4.49) 28(9.113,-3.99) 29(9.113,-3.49) 30(9.113,-2.99) 31(9.113,-2.49) 32(9.113,-1.99) 33(9.113,-1.49) 34(9.113,-0.99) 35(9.113,-0.49) 36(9.113,0.01)
  oval 0.26x1 smd: 13(1.813,-7.29) 14(2.313,-7.29) 15(2.813,-7.29) 16(3.313,-7.29) 17(3.813,-7.29) 18(4.313,-7.29) 19(4.813,-7.29) 20(5.313,-7.29) 21(5.813,-7.29) 22(6.313,-7.29) 23(6.813,-7.29) 24(7.313,-7.29) 37(7.313,1.81) 38(6.813,1.81) 39(6.313,1.81) 40(5.813,1.81) 41(5.313,1.81) 42(4.813,1.81) 43(4.313,1.81) 44(3.813,1.81) 45(3.313,1.81) 46(2.813,1.81) 47(2.313,1.81) 48(1.813,1.81)
  silkscreen extent 1.1,-6.2 8.03,0.73
QFP48-long [mm]
  oval 1.8x0.3 smd: 1(-4.048,2.063) 2(-4.048,1.563) 3(-4.048,1.063) 4(-4.048,0.563) 5(-4.048,0.063) 6(-4.048,-0.437) 7(-4.048,-0.937) 8(-4.048,-1.437) 9(-4.048,-1.937) 10(-4.048,-2.437) 11(-4.048,-2.937) 12(-4.048,-3.437) 25(4.052,-3.437) 26(4.052,-2.937) 27(4.052,-2.437) 28(4.052,-1.937) 29(4.052,-1.437) 30(4.052,-0.937) 31(4.052,-0.437) 32(4.052,0.063) 33(4.052,0.563) 34(4.052,1.063) 35(4.052,1.563) 36(4.052,2.063)
  oval 0.3x1.8 smd: 13(-2.748,-4.737) 14(-2.248,-4.737) 15(-1.748,-4.737) 16(-1.248,-4.737) 17(-0.748,-4.737) 18(-0.248,-4.737) 19(0.252,-4.737) 20(0.752,-4.737) 21(1.252,-4.737) 22(1.752,-4.737) 23(2.252,-4.737) 24(2.752,-4.737) 37(2.752,3.363) 38(2.252,3.363) 39(1.752,3.363) 40(1.252,3.363) 41(0.752,3.363) 42(0.252,3.363) 43(-0.248,3.363) 44(-0.748,3.363) 45(-1.248,3.363) 46(-1.748,3.363) 47(-2.248,3.363) 48(-2.748,3.363)
  silkscreen extent -4.17,-3.44 2.75,2.89, body extent -3.5,-4.19 3.5,2.81, height 1.6
QFP100 [mm]
  rect 1.5x0.25 smd: 1(0,0)
  oval 1.5x0.25 smd: 2(0,-0.5) 3(0,-1) 4(0,-1.5) 5(0,-2) 6(0,-2.5) 7(0,-3) 8(0,-3.5) 9(0,-4) 10(0,-4.5) 11(0,-5) 12(0,-5.5) 13(0,-6) 14(0,-6.5) 15(0,-7) 16(0,-7.5) 17(0,-8) 18(0,-8.5) 19(0,-9) 20(0,-9.5) 21(0,-10) 22(0,-10.5) 23(0,-11) 24(0,-11.5) 25(0,-12) 51(16,-12) 52(16,-11.5) 53(16,-11) 54(16,-10.5) 55(16,-10) 56(16,-9.5) 57(16,-9) 58(16,-8.5) 59(16,-8) 60(16,-7.5) 61(16,-7) 62(16,-6.5) 63(16,-6) 64(16,-5.5) 65(16,-5) 66(16,-4.5) 67(16,-4) 68(16,-3.5) 69(16,-3) 70(16,-2.5) 71(16,-2) 72(16,-1.5) 73(16,-1) 74(16,-0.5) 75(16,0)
  oval 0.25x1.5 smd: 26(2,-14) 27(2.5,-14) 28(3,-14) 29(3.5,-14) 30(4,-14) 31(4.5,-14) 32(5,-14) 33(5.5,-14) 34(6,-14) 35(6.5,-14) 36(7,-14) 37(7.5,-14) 38(8,-14) 39(8.5,-14) 40(9,-14) 41(9.5,-14) 42(10,-14) 43(10.5,-14) 44(11,-14) 45(11.5,-14) 46(12,-14) 47(12.5,-14) 48(13,-14) 49(13.5,-14) 50(14,-14) 76(14,2) 77(13.5,2) 78(13,2) 79(12.5,2) 80(12,2) 81(11.5,2) 82(11,2) 83(10.5,2) 84(10,2) 85(9.5,2) 86(9,2) 87(8.5,2) 88(8,2) 89(7.5,2) 90(7,2) 91(6.5,2) 92(6,2) 93(5.5,2) 94(5,2) 95(4.5,2) 96(4,2) 97(3.5,2) 98(3,2) 99(2.5,2) 100(2,2)
  silkscreen extent 1.28,-12.71 14.71,0.72
RAD-0.1 [mm] "Radial Cap, Thru-Hole; 2 Leads; 0.1 in Pin Spacing"
  round 1.2 hole 0.7: 1(-1.27,0) 2(1.27,0)
  silkscreen extent -2.54,-1.27 2.54,1.27
SMA#1 [mm]
  rect 1.8x2 smd paste+0: A(-2,0)
  rect 1.8x2 smd: K(2,0)
  silkscreen extent -2,-1.48 2,1.48
SMA#2 [mm]
  rect 1.8x2 smd: A(-2,0) K(2,0)
  silkscreen extent -2,-1.48 2,1.48
SMB [mm]
  rect 2.4x2.5 smd: A(-2.385,0) K(2.385,0)
  silkscreen extent -2.28,-1.9 2.3,1.9
SO8 [mm]
  rect 0.6x2.2 smd: 1(-1.905,-2.6)
  oval 0.6x2.2 smd: 2(-0.635,-2.6) 3(0.635,-2.6) 4(1.905,-2.6) 5(1.905,2.6) 6(0.635,2.6) 7(-0.635,2.6) 8(-1.905,2.6)
  silkscreen extent -2.88,-2.72 2.5,1.1
SOP8 [mm]
  rect 3x0.8 smd: 1(0,0)
  oval 3x0.8 smd: 2(0,-2.54) 3(0,-5.08) 4(0,-7.62) 5(9.6,-7.62) 6(9.6,-5.08) 7(9.6,-2.54) 8(9.6,0)
  silkscreen extent 2.33,-8.89 7.27,1.27
SOT23(3) [mil]
  rect 36x36 smd: 1(0,0) 2(75,0)
  rect 36x50 smd: 3(38,80)
  silkscreen extent -20,-5 95,85
SOT23-3 [mm]
  rect 1x1.25 smd: 1(0,0) 2(1.905,0) 3(0.965,2.032)
  silkscreen extent -0.51,-0.13 2.41,2.16
SOT23_2 [mm]
  rect 1x1 smd: 1(1.9,0) 2(0,0) 3(0.95,-2.1)
SUNSWIFTLOGO [mm] "Sunswift Logo"
  silkscreen extent -9.32,-3.58 10.19,3.81
SUPERCAP [mil]
  round 60 hole 31.5: 1(0,0) 2(137.8,0)
  silkscreen extent -87,-156 228,159
tab_connect [mm]
  rrect50% 9.5x2.5 hole 1 slot 8 at 0 deg: 0(-2.6,4.4)
TRIAD5F#1 [mm]
  round 5 hole 3: 0(-6.934,1.219) 0(5.055,1.219)
  round 1.2 hole 0.7: 1(0,0) 2(0.584,2.184) 3(-1.016,2.184) 4(-2.616,2.184) 5(-2.032,0)
  silkscreen extent -8.56,-3.86 6.68,10.87
TRIAD5F#2 [mm]
  round 5.08 hole 3: 0(-6.934,1.219) 0(5.055,1.219)
  round 1.143 hole 0.7: 1(0,0) 2(0.584,2.184) 3(-1.016,2.184) 4(-2.616,2.184) 5(-2.032,0)
  silkscreen extent -8.56,-3.86 6.68,10.87
trimpot [mm]
  round 2 hole 1.3: 1(0,0) 2(5,0) 3(2.5,2.5)
  silkscreen extent -1,-1.1 6,3.9
TSQFP50P900X900-48N [mm]
  oval 1.8x0.3 smd: 1(-4.05,2.75) 2(-4.05,2.25) 3(-4.05,1.75) 4(-4.05,1.25) 5(-4.05,0.75) 6(-4.05,0.25) 7(-4.05,-0.25) 8(-4.05,-0.75) 9(-4.05,-1.25) 10(-4.05,-1.75) 11(-4.05,-2.25) 12(-4.05,-2.75) 25(4.05,-2.75) 26(4.05,-2.25) 27(4.05,-1.75) 28(4.05,-1.25) 29(4.05,-0.75) 30(4.05,-0.25) 31(4.05,0.25) 32(4.05,0.75) 33(4.05,1.25) 34(4.05,1.75) 35(4.05,2.25) 36(4.05,2.75)
  oval 0.3x1.8 smd: 13(-2.75,-4.05) 14(-2.25,-4.05) 15(-1.75,-4.05) 16(-1.25,-4.05) 17(-0.75,-4.05) 18(-0.25,-4.05) 19(0.25,-4.05) 20(0.75,-4.05) 21(1.25,-4.05) 22(1.75,-4.05) 23(2.25,-4.05) 24(2.75,-4.05) 37(2.75,4.05) 38(2.25,4.05) 39(1.75,4.05) 40(1.25,4.05) 41(0.75,4.05) 42(0.25,4.05) 43(-0.25,4.05) 44(-0.75,4.05) 45(-1.25,4.05) 46(-1.75,4.05) 47(-2.25,4.05) 48(-2.75,4.05)
  silkscreen extent -4.17,-2.75 2.75,3.57, body extent -3.5,-3.5 3.5,3.5, height 1.6
VOM452T [mm]
  rect 1.5x0.9 smd: 1(0.75,-0.05)
  oval 1.5x0.9 smd: 3(0.75,-2.59) 4(7.25,-2.59) 5(7.25,-1.32) 6(7.25,-0.05)
  silkscreen extent 1.84,-3.3 6.16,0.59
WATCHA [mm]
  round 1 hole 0.5: 1(0,0) 2(1.7,0)
  Top Layer region: -0.25,1.85 2,1.85 2,8.95 -0.25,8.95
  silkscreen extent -0.7,-0.7 2.4,9.4

## Part data
32kHz: library part XTAL, "Crystal Oscillator"
C1 C1 C1 C1 C2 C3 C4 C4 C5 C5 C5 C6 C6 C6 C7 C7 C8 C8 C9 C9 C10 C11 C12 C12 C13 C13 C15 C16 C17 C18 C19 C20 C22 C23 C24 C24 C24 C25 C26 C26 C27 C28 C29 C29 C30 C30 C30 C31 C31 C31 C32 C32 C32 C33: library part CAP, "Capacitor"
C2 C2_1 C2_2 C2_3 C3 C3 C4 C5 C6 C7 C8: library part "Cap Pol3", "Polarized Capacitor (Surface Mount)"
C14 C21 C25: library part "CAP POL3", "Polarized Capacitor (Surface Mount)"
C14_1: "3-Terminal Medium-Current Positive Fixed Voltage Regulator"
C15 C16: library part CAP-POL, "Capacitor"
C190: "Polarized Capacitor (Axial)"
C194 C195: "Capacitor"
D1 D1 D1 D3 D7_1 D7_2 D7_3: library part DIODE, "Diode"
D1 D2: library part LED
D2 D2 D2 D9: library part "D SCHOTTKY", "Schottky Diode"
D3_2 D4 D5_1 D6_1 D7 D8 D9_1 D10 D11: library part LED2, "Typical RED, GREEN, YELLOW, AMBER GaAs LED"
D3_3 D16: library part LED-TRILEVEL, "Three level LED"
D5: library part LED, "HSMG-C170, Green LED"
D6: library part "DIODE SERIES 2", "diode, series connected"
F1 F1 F1 F3: library part FUSE2, "Fuse"
F1: "Fuse"
F2_1 F2_2 F2_3: library part FUSE
H1 H1_1 H2 H2_1 H3 H3_1 H4 H4_1: "Hole"
J1 J1 J1_2 J2 J2 J2_2 J3: "Connector, 2 pin, with shield @ S"
J3 "PROGRAMMING HEADER" "PROGRAMMING HEADER": library part LPCLink_Connector
J4 J4 J4: "Connector"
J4: library part "Header 10X2", "Header, 10-Pin, Dual row"
L1 L1 L1 L2 L2: library part Inductor, "Inductor"
L6 L7: library part INDUCTOR, "Inductor"
P1: "Header, 4-Pin, Right Angle"
Q1 Q1_1 Q1_2 Q1_3 Q2 Q4 Q6: "1.7A, 20V N-Channel Enhancement mode FET"
Q2 Q3 Q3 Q5: "1.1A, 30V P-Channel Enhancement mode FET"
R1 R1 R1 R1 R2 R2 R2 R2 R3 R3 R3_1 R4 R4 R4 R4_1 R5 R5 R6 R7 R7 R8 R8 R8 R9 R9 R9_1 R10 R10 R11 R11 R11 R12 R12 R12 R13 R14 R14_1 R15 R15 R16 R16 R17 R17 R18 R18 R19 R19 R20 R21 R22 R22 R23 R23 R24 R24 R25 R26 R27 R28 R29 R30 R31 R32 R33 R34 R35 R36 R37 R38 R39 R40 R112: library part RES1, "Resistor"
R3: "Potentiometer"
R5_1 R6_1 R7_4: library part Res3, "Resistor"
R6: "Thermistor, NTC"
R7_1 R7_2 R7_3 R25 R26: library part RES1
R8_2 R9_2 R10_1 R11_2 R12_2 R13_2: "Resistor"
R13: library part RES1, "Resistor, 100R, 1W, 10V"
RTC: "MCP79410-I/SN-ND"
U1 U1 U1 U6: "3.3V CAN Transciever"
U2 U3 U4: "Step-down converter"
U3 U7 U7: library part LPC11C14_Full
U4 U8 U8: library part XC61F, "SOT23 reset generator"
U7: "IL712 Optical Isolator"
U10: "NXP Cortex-M3 Microcontroller, 100pin 100MHz"
Y1 Y1 Y1 Y1 Y2: library part CRYSTAL, "Crystal"

## Free pads (board coordinates)
  round 1.074 on Bottom Overlay mask+0.2: 2(44.484,58.825)
  round 1.981 on Top Overlay mask+0.2: 2(61.085,94.696)
  round 3.5 hole 2.54: 3(132.352,75.828) 3(132.352,183.828) 3(161.352,75.828) 3(161.352,183.828)

## Via types
v1: diameter 0.8, hole 0.4, Top Layer to Bottom Layer, 133 vias
v2: diameter 0.4, hole 0.2, Top Layer to Bottom Layer, tented both sides, 32 vias
v3: diameter 0.8, hole 0.4, Top Layer to Bottom Layer, tented both sides, 30 vias
v4: diameter 0.6, hole 0.3, Top Layer to Bottom Layer, tented both sides, 15 vias
v5: diameter 1.27, hole 1, Top Layer to Bottom Layer, 6 vias
v6: diameter 0.4, hole 0.2, Top Layer to Bottom Layer, 4 vias
v7: diameter 2, hole 1, Top Layer to Bottom Layer, 4 vias
v8: diameter 1, hole 0.4, Top Layer to Bottom Layer, 3 vias
v9: diameter 0.8, hole 0.4, Top Layer to Bottom Layer, tented top, 2 vias
v10: diameter 1.27, hole 0.711, Top Layer to Bottom Layer, 2 vias
v11: diameter 1, hole 0.6, Top Layer to Bottom Layer, tented both sides, 2 vias
v12: diameter 0.6, hole 0.3, Top Layer to Bottom Layer, 2 vias
v13: diameter 0.8, hole 0.4, Top Layer to Bottom Layer, tented bottom, 1 vias

## Nets (pads, with @x,y where several pads share a name; then routed paths per layer and width w, separated by ;. In a path a pad name is that pad's centre, name@x,y a point inside that pad or via, vN(x,y) a via of type N, cw(c..) or ccw(c..) an arc to the next point about the centre after c; other vN are vias at no path point)
pads on no net: 32kHz.1 32kHz.2 "BMP 085.3V3" "BMP 085.EOC" "BMP 085.GND" "BMP 085.SCL" "BMP 085.SDA" "BMP 085.XCLR" "PROGRAMMING HEADER.1" "PROGRAMMING HEADER.2" "PROGRAMMING HEADER.3" "PROGRAMMING HEADER.4" "PROGRAMMING HEADER.5" "PROGRAMMING HEADER.6" "PROGRAMMING HEADER.7" "PROGRAMMING HEADER.8" "UART DEBUG.1" "UART DEBUG.2" "UART DEBUG.3" "UART DEBUG.4" +.0 -.0 BAT54A.1 BAT54A.2 BAT54A.3 C1.1 C1.2 C2.1 C2.2 C2_1.1 C2_1.2 C2_2.1 C2_2.2 C2_3.1 C2_3.2 C3.1 C3.2 C4.1 C4.2 C5.1 C5.2 C6.1 C6.2 C7.1 C7.2 C8.1 C8.2 C9.1 C9.2 C10.1 C10.2 C11.1 C11.2 C12.1 C12.2 C13.1 C13.2 C14.1 C14.2 C14_1.1 C14_1.2 C14_1.3 C15.1 C15.2 C16.1 C16.2 C17.1 C17.2 C18.1 C18.2 C19.1 C19.2 C20.1 C20.2 C21.1 C21.2 C22.1 C22.2 C23.1 C23.2 C24.1 C24.2 C25.1 C25.2 C26.1 C26.2 C27.1 C27.2 C28.1 C28.2 C29.1 C29.2 C30.1 C30.2 C31.1 C31.2 C32.1 C32.2 C33.1 C33.2 C190.1 C190.2 C194.1 C194.2 C195.1 C195.2 D1.A D1.K D2.A D2.K D3.1 D3.2 D3.3 D3.A D3.K D3_2.1 D3_2.2 D3_3.1 D3_3.2 D3_3.3 D3_3.4 D3_3.5 D3_3.6 D4.1 D4.2 D5.A D5.K D5_1.1 D5_1.2 D6.A D6.C D6.K D6_1.1 D6_1.2 D7.1 D7.2 D7_1.A D7_1.K D7_2.A D7_2.K D7_3.A D7_3.K D8.1 D8.2 D9.A D9.K D9_1.1 D9_1.2 D10.1 D10.2 D11.1 D11.2 D16.1 D16.2 D16.3 D16.4 D16.5 D16.6 F1.1 F1.2 F2_1.1 F2_1.2 F2_2.1 F2_2.2 F2_3.1 F2_3.2 F3.1 F3.2 GPS.3V3 GPS.BAT GPS.GND GPS.PPS GPS.RX GPS.RX2 GPS.TX GPS.TX2 H1.1 H1_1.1 H2.1 H2_1.1 H3.1 H3_1.1 H4.1 H4_1.1 J1.0 J1.1 J1.2 J1.3 J1.4 J1.5 J1_2.0 J1_2.1 J1_2.2 J1_2.3 J1_2.4 J1_2.5 J2.0 J2.1 J2.2 J2.3 J2.4 J2.5 J2_2.0 J2_2.1 J2_2.2 J2_2.3 J2_2.4 J2_2.5 J3.0 J3.1 J3.2 J3.3 J3.4 J3.5 J3.6 J3.7 J3.8 J4.0 J4.1 J4.2 J4.3 J4.4 J4.5 J4.6 J4.7 J4.8 J4.9 J4.10 J4.11 J4.12 J4.13 J4.14 J4.15 J4.16 J4.17 J4.18 J4.19 J4.20 L1.1 L1.2 L2.1 L2.2 L6.1 L6.2 L7.1 L7.2 LCD.1 LCD.2 LCD.3 LCD.4 LCD.5 LCD.6 LCD.7 LCD.8 LCD.9 LCD.10 LCD.11 LCD.12 LCD.13 LCD.14 LCD.15 LCD.16 OP1.1 OP1.3 OP1.4 OP1.5 OP1.6 P1.1 P1.2 P1.3 P1.4 P2.0 P2.1 P2.2 P2.3 P2.4 P2.5 P2.6 P2.7 Q1.1 Q1.2 Q1.3 Q1_1.1 Q1_1.2 Q1_1.3 Q1_2.1 Q1_2.2 Q1_2.3 Q1_3.1 Q1_3.2 Q1_3.3 Q2.1 Q2.2 Q2.3 Q3.1 Q3.2 Q3.3 Q4.1 Q4.2 Q4.3 Q5.1 Q5.2 Q5.3 Q6.1 Q6.2 Q6.3 R1.1 R1.2 R2.1 R2.2 R3.1 R3.2 R3.3 R3_1.1 R3_1.2 R4.1 R4.2 R4_1.1 R4_1.2 R5.1 R5.2 R5_1.1 R5_1.2 R6.1 R6.2 R6_1.1 R6_1.2 R7.1 R7.2 R7_1.1 R7_1.2 R7_2.1 R7_2.2 R7_3.1 R7_3.2 R7_4.1 R7_4.2 R8.1 R8.2 R8_2.1 R8_2.2 R9.1 R9.2 R9_1.1 R9_1.2 R9_2.1 R9_2.2 R10.1 R10.2 R10_1.1 R10_1.2 R11.1 R11.2 R11_2.1 R11_2.2 R12.1 R12.2 R12_2.1 R12_2.2 R13.1 R13.2 R13_2.1 R13_2.2 R14.1 R14.2 R14_1.1 R14_1.2 R15.1 R15.2 R16.1 R16.2 R17.1 R17.2 R18.1 R18.2 R19.1 R19.2 R20.1 R20.2 R21.1 R21.2 R22.1 R22.2 R23.1 R23.2 R24.1 R24.2 R25.1 R25.2 R26.1 R26.2 R27.1 R27.2 R28.1 R28.2 R29.1 R29.2 R30.1 R30.2 R31.1 R31.2 R32.1 R32.2 R33.1 R33.2 R34.1 R34.2 R35.1 R35.2 R36.1 R36.2 R37.1 R37.2 R38.1 R38.2 R39.1 R39.2 R40.1 R40.2 R112.1 R112.2 RTC.1 RTC.2 RTC.3 RTC.4 RTC.5 RTC.6 RTC.7 RTC.8 U1.1 U1.2 U1.3 U1.4 U1.5 U1.6 U1.7 U1.8 U2.1 U2.2 U2.3 U2.4 U2.5 U2.6 U2.7 U2.8 U2.9 U2.10 U3.1 U3.2 U3.3 U3.4 U3.5 U3.6 U3.7 U3.8 U3.9 U3.10 U3.11 U3.12 U3.13 U3.14 U3.15 U3.16 U3.17 U3.18 U3.19 U3.20 U3.21 U3.22 U3.23 U3.24 U3.25 U3.26 U3.27 U3.28 U3.29 U3.30 U3.31 U3.32 U3.33 U3.34 U3.35 U3.36 U3.37 U3.38 U3.39 U3.40 U3.41 U3.42 U3.43 U3.44 U3.45 U3.46 U3.47 U3.48 U4.1 U4.2 U4.3 U4.4 U4.5 U4.6 U4.7 U4.8 U6.1 U6.2 U6.3 U6.4 U6.5 U6.6 U6.7 U6.8 U7.1 U7.2 U7.3 U7.4 U7.5 U7.6 U7.7 U7.8 U7.9 U7.10 U7.11 U7.12 U7.13 U7.14 U7.15 U7.16 U7.17 U7.18 U7.19 U7.20 U7.21 U7.22 U7.23 U7.24 U7.25 U7.26 U7.27 U7.28 U7.29 U7.30 U7.31 U7.32 U7.33 U7.34 U7.35 U7.36 U7.37 U7.38 U7.39 U7.40 U7.41 U7.42 U7.43 U7.44 U7.45 U7.46 U7.47 U7.48 U8.1 U8.2 U8.3 U10.1 U10.2 U10.3 U10.4 U10.5 U10.6 U10.7 U10.8 U10.9 U10.10 U10.11 U10.12 U10.13 U10.14 U10.15 U10.16 U10.17 U10.18 U10.19 U10.20 U10.21 U10.22 U10.23 U10.24 U10.25 U10.26 U10.27 U10.28 U10.29 U10.30 U10.31 U10.32 U10.33 U10.34 U10.35 U10.36 U10.37 U10.38 U10.39 U10.40 U10.41 U10.42 U10.43 U10.44 U10.45 U10.46 U10.47 U10.48 U10.49 U10.50 U10.51 U10.52 U10.53 U10.54 U10.55 U10.56 U10.57 U10.58 U10.59 U10.60 U10.61 U10.62 U10.63 U10.64 U10.65 U10.66 U10.67 U10.68 U10.69 U10.70 U10.71 U10.72 U10.73 U10.74 U10.75 U10.76 U10.77 U10.78 U10.79 U10.80 U10.81 U10.82 U10.83 U10.84 U10.85 U10.86 U10.87 U10.88 U10.89 U10.90 U10.91 U10.92 U10.93 U10.94 U10.95 U10.96 U10.97 U10.98 U10.99 U10.100 Y1.1 Y1.2 Y2.1 Y2.2